# EAGLE board M1125A (EAGLE 6.6.0)
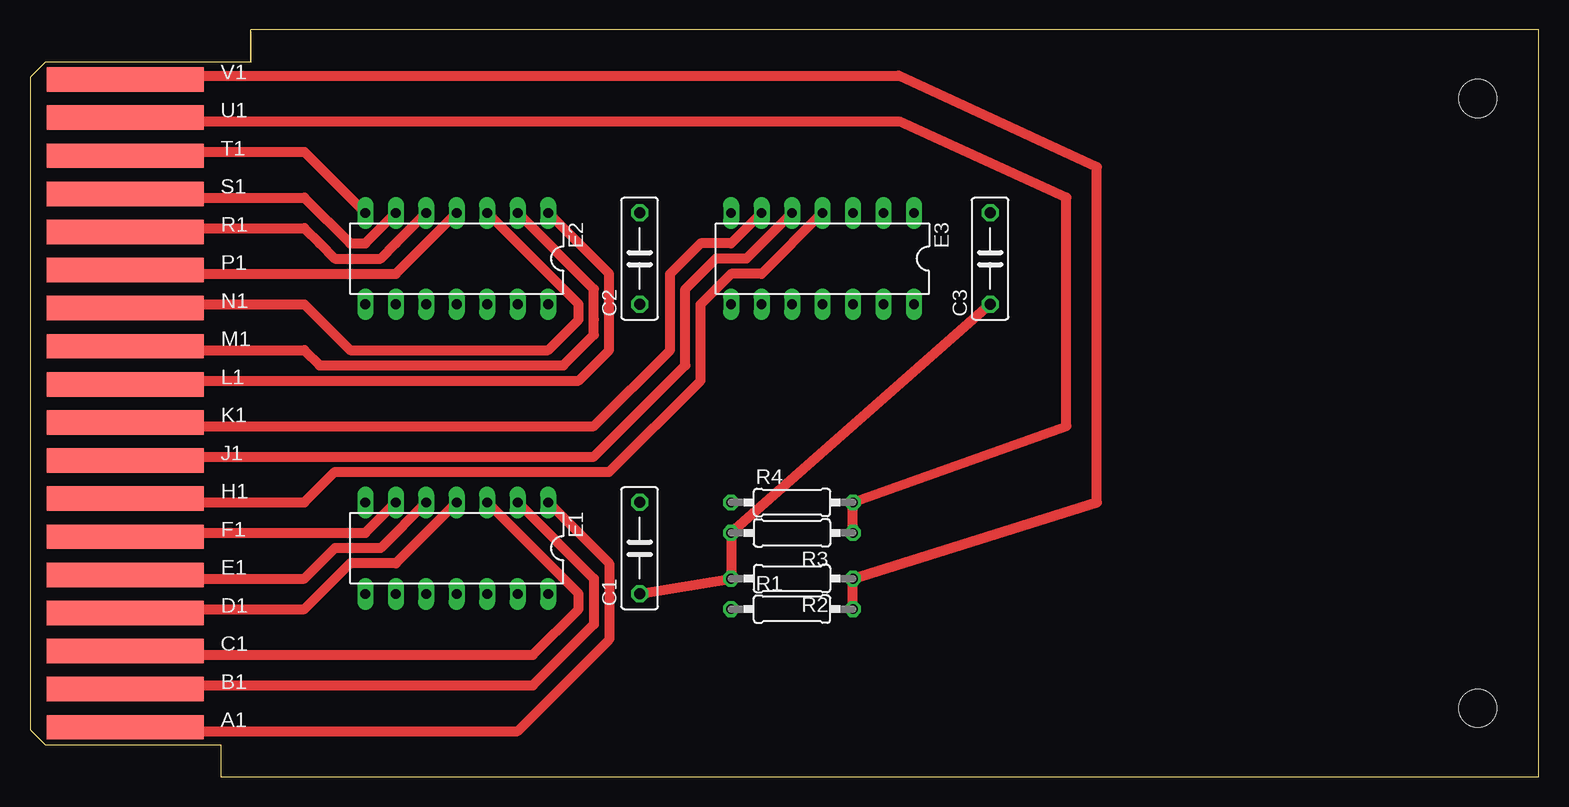
[diagram p0: board, top side]
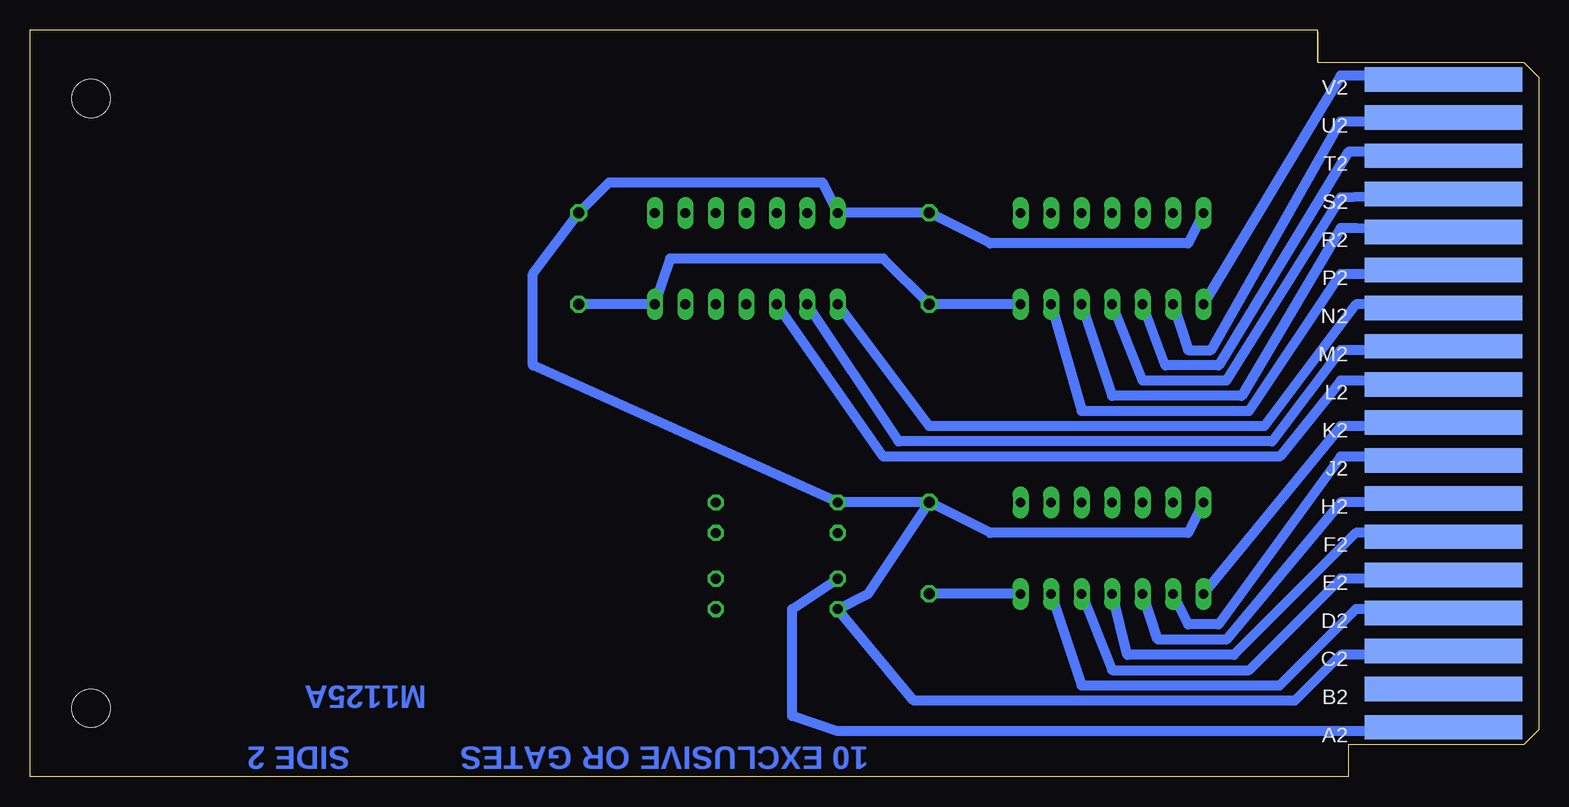
[diagram p1: board, bottom side, seen from below]

Size 125.73 x 62.23 mm. Coordinates in mm from the lower left corner, seen from the top.
Copper layers (1+16): Top 0.035mm / dielectric 1.5mm / Bottom 0.035mm
Design rules "16mils": minimum track width 16mil, minimum drill 32mil, track to track 15mil, track to pad 10mil, pad to pad 10mil, via to via 10mil, smd to smd 10mil, copper to edge 13mil, drill to drill 10mil, minimum pad ring 10mil, minimum via ring 8mil, stop-mask expansion 0mil, vias tented up to drill 0mil, thermal gap 10mil
Net classes: 0 default: width 0.813 mm

## Footprints (pad centres in the part's own frame; a part is rotated, then mirrored left to right if it is on the bottom)
C075-032X103 = drill 0.914 octagon: 1 -3.81,0; 2 3.81,0
DIL14 = drill 0.813 long: 1 -7.62,-3.81; 2 -5.08,-3.81; 3 -2.54,-3.81; 4 0,-3.81; 5 2.54,-3.81; 6 5.08,-3.81; 7 7.62,-3.81; 8 7.62,3.81; 9 5.08,3.81; 10 2.54,3.81; 11 0,3.81; 12 -2.54,3.81; 13 -5.08,3.81; 14 -7.62,3.81
0207/10 = drill 0.813 octagon: 1 -5.08,0; 2 5.08,0
SINGLE = hole 3.175: 120.65,56.515; 120.65,5.715
EDGE-CON2 = smd 13.106 x 2.032: A1 7.938,4.128; B1 7.938,7.303; C1 7.938,10.477; D1 7.938,13.652; E1 7.938,16.828; F1 7.938,20.003; H1 7.938,23.177; J1 7.938,26.352; K1 7.938,29.527; L1 7.938,32.703; M1 7.938,35.877; N1 7.938,39.053; P1 7.938,42.227; R1 7.938,45.403; S1 7.938,48.578; T1 7.938,51.752; U1 7.938,54.928; V1 7.938,58.102 | smd 13.106 x 2.032 bottom: A2 7.938,4.128; B2 7.938,7.303; C2 7.938,10.477; D2 7.938,13.652; E2 7.938,16.828; F2 7.938,20.003; H2 7.938,23.177; J2 7.938,26.352; K2 7.938,29.527; L2 7.938,32.703; M2 7.938,35.877; N2 7.938,39.053; P2 7.938,42.227; R2 7.938,45.403; S2 7.938,48.578; T2 7.938,51.752; U2 7.938,54.928; V2 7.938,58.102

## Placement (x,y rotation side)
C1  .01uF  [C075-032X103]  50.8,19.05 90 top
C2  .01uF  [C075-032X103]  50.8,43.18 90 top
C3  .01uF  [C075-032X103]  80.01,43.18 90 top
E1  7486N  [DIL14]  35.56,19.05 180 top
E2  7486N  [DIL14]  35.56,43.18 180 top
E3  7486N  [DIL14]  66.04,43.18 180 top
R1  750  [0207/10]  63.5,13.97 0 top
R2  330  [0207/10]  63.5,16.51 180 top
R3  330  [0207/10]  63.5,20.32 180 top
R4  750  [0207/10]  63.5,22.86 0 top
U$1  OUTLINE-SINGLE  [SINGLE]  0,0 0 top
U$2  [EDGE-CON2]  0,0 0 top

## Library data of the parts
C1-C3 R1-R4 = rcl
E1-E3 = 74xx-us
U$1 U$2 = dec-con

## Nets
GND: C1.2 C2.2 C3.2 E1.7 E2.7 E3.7 R1.1 R4.1 U$2.C2 U$2.T1
N$1: E2.9 U$2.U2
N$2: E2.10 U$2.T2
N$3: E2.12 U$2.R2
N$4: E2.13 U$2.P2
N$5: E2.11 U$2.S2
N$6: E2.8 U$2.V2
N$7: E1.13 U$2.D2
N$8: E1.12 U$2.E2
N$9: E1.10 U$2.H2
N$10: E1.9 U$2.J2
N$11: E1.8 U$2.K2
N$12: E1.11 U$2.F2
N$13: E3.10 U$2.L2
N$14: E3.9 U$2.M2
N$15: E3.8 U$2.N2
N$16: R1.2 R2.1 U$2.V1
N$17: R3.1 R4.2 U$2.U1
N$18: E1.2 U$2.B1
N$19: E1.1 U$2.A1
N$20: E1.3 U$2.C1
N$21: E1.6 U$2.F1
N$22: E1.4 U$2.D1
N$23: E1.5 U$2.E1
N$24: E3.5 U$2.J1
N$25: E3.4 U$2.H1
N$26: E3.6 U$2.K1
N$27: E2.6 U$2.S1
N$28: E2.3 U$2.N1
N$29: E2.1 U$2.L1
N$30: E2.2 U$2.M1
N$31: E2.4 U$2.P1
N$32: E2.5 U$2.R1
VCC: C1.1 C2.1 C3.1 E1.14 E2.14 E3.14 R2.2 R3.2 U$2.A2

## Tracks (layer width: path | path; a pad name or v marks a point on that pad's centre or on a via)
GND
  Top 0.813: U$2.T1 10.16,52.07 22.86,52.07 E2.7
  Bottom 0.813: E2.7 29.21,44.45 45.72,44.45 C2.2 E3.7 59.69,49.53 77.47,49.53 C3.2 83.82,41.91 83.82,34.29 R4.1 C1.2 | E1.7 29.21,20.32 45.72,20.32 C1.2 | C1.2 55.88,15.24 R1.1 52.07,6.35 20.32,6.35 16.51,10.16 8.89,10.16 U$2.C2
N$1
  Bottom 0.813: E2.9 29.21,35.56 27.31,35.56 16.51,54.61 8.89,54.61 U$2.U2
N$2
  Bottom 0.813: U$2.T2 8.89,52.07 15.88,52.07 26.67,34.29 31.12,34.29 E2.10
N$3
  Bottom 0.813: U$2.R2 15.24,45.72 16.51,45.72 24.77,31.75 35.56,31.75 E2.12
N$4
  Bottom 0.813: E2.13 38.1,30.48 24.13,30.48 16.51,41.91 8.89,41.91 U$2.P2
N$5
  Bottom 0.813: U$2.S2 16.51,48.26 26.04,33.02 33.02,33.02 E2.11
N$6
  Bottom 0.813: U$2.V2 8.89,58.42 16.51,58.42 E2.8
N$7
  Bottom 0.813: E1.13 38.1,7.62 21.59,7.62 15.24,13.97 8.89,13.97 U$2.D2
N$8
  Bottom 0.813: E1.12 35.56,8.89 24.13,8.89 16.51,16.51 8.89,16.51 U$2.E2
N$9
  Bottom 0.813: U$2.H2 8.89,22.86 16.51,22.86 26.04,11.43 31.75,11.43 E1.10
N$10
  Bottom 0.813: U$2.J2 8.89,26.67 16.51,26.67 26.67,12.7 29.21,12.7 E1.9
N$11
  Bottom 0.813: U$2.K2 8.89,29.21 16.51,29.21 E1.8
N$12
  Bottom 0.813: U$2.F2 8.89,20.32 15.24,20.32 25.4,10.16 34.29,10.16 E1.11
N$13
  Bottom 0.813: U$2.L2 8.89,33.02 16.51,33.02 21.59,26.67 54.61,26.67 E3.10
N$14
  Bottom 0.813: U$2.M2 10.16,35.56 16.51,35.56 22.23,27.94 53.34,27.94 E3.9
N$15
  Bottom 0.813: U$2.N2 8.89,39.37 15.24,39.37 22.86,29.21 50.8,29.21 E3.8
N$16
  Top 0.813: R1.2 R2.1 88.9,22.86 88.9,50.8 72.39,58.42 8.89,58.42 U$2.V1
N$17
  Top 0.813: R3.1 R4.2 86.36,29.21 86.36,48.26 72.39,54.61 8.89,54.61 U$2.U1
N$18
  Top 0.813: E1.2 46.99,16.51 46.99,12.7 41.91,7.62 11.43,7.62 U$2.B1
N$19
  Top 0.813: E1.1 48.26,17.78 48.26,11.43 40.64,3.81 8.89,3.81 U$2.A1
N$20
  Top 0.813: E1.3 45.72,15.24 45.72,13.97 41.91,10.16 8.89,10.16 U$2.C1
N$21
  Top 0.813: E1.6 27.94,20.32 8.89,20.32 U$2.F1
N$22
  Top 0.813: E1.4 30.48,17.78 26.67,17.78 22.86,13.97 8.89,13.97 U$2.D1
N$23
  Top 0.813: E1.5 29.21,19.05 25.4,19.05 22.86,16.51 8.89,16.51 U$2.E1
N$24
  Top 0.813: U$2.J1 8.89,26.67 46.99,26.67 54.61,34.29 54.61,40.64 57.15,43.18 59.69,43.18 E3.5
N$25
  Top 0.813: U$2.H1 8.89,22.86 22.86,22.86 25.4,25.4 48.26,25.4 55.88,33.02 55.88,39.37 58.42,41.91 60.96,41.91 E3.4
N$26
  Top 0.813: U$2.K1 10.16,29.21 46.99,29.21 53.34,35.56 53.34,41.91 55.88,44.45 58.42,44.45 E3.6
N$27
  Top 0.813: U$2.S1 8.89,48.26 22.86,48.26 26.67,44.45 27.94,44.45 E2.6
N$28
  Top 0.813: U$2.N1 8.89,39.37 22.86,39.37 26.67,35.56 43.18,35.56 45.72,38.1 45.72,39.37 E2.3
N$29
  Top 0.813: U$2.L1 8.89,33.02 45.72,33.02 48.26,35.56 48.26,41.91 E2.1
N$30
  Top 0.813: U$2.M1 8.89,35.56 22.86,35.56 24.13,34.29 43.18,34.29 44.45,34.29 46.99,36.83 46.99,38.1 46.99,40.64 E2.2
N$31
  Top 0.813: U$2.P1 8.89,41.91 30.48,41.91 E2.4
N$32
  Top 0.813: U$2.R1 8.89,45.72 22.86,45.72 24.13,44.45 25.4,43.18 29.21,43.18 30.48,44.45 E2.5
VCC
  Top 0.813: C1.1 R2.2 R3.2 C3.1
  Bottom 0.813: E2.14 C2.1 54.61,43.18 72.39,43.18 E3.14 C3.1 | E1.14 C1.1 | U$2.A2 8.89,3.81 58.42,3.81 62.23,5.08 62.23,13.97 R2.2

## Text on the board
Bottom: M1125A | 10 EXCLUSIVE OR GATES | SIDE 2